# Altium PCB PCB2.PcbDoc
Units mm, origin at the board's own origin, x right, y up, seen from the top; angles counter-clockwise.
Board outline 171.96 x 151.38 mm, 2 copper layers (Top Layer, Bottom Layer); 22 components, 29 nets, 115 pads, 0 vias.
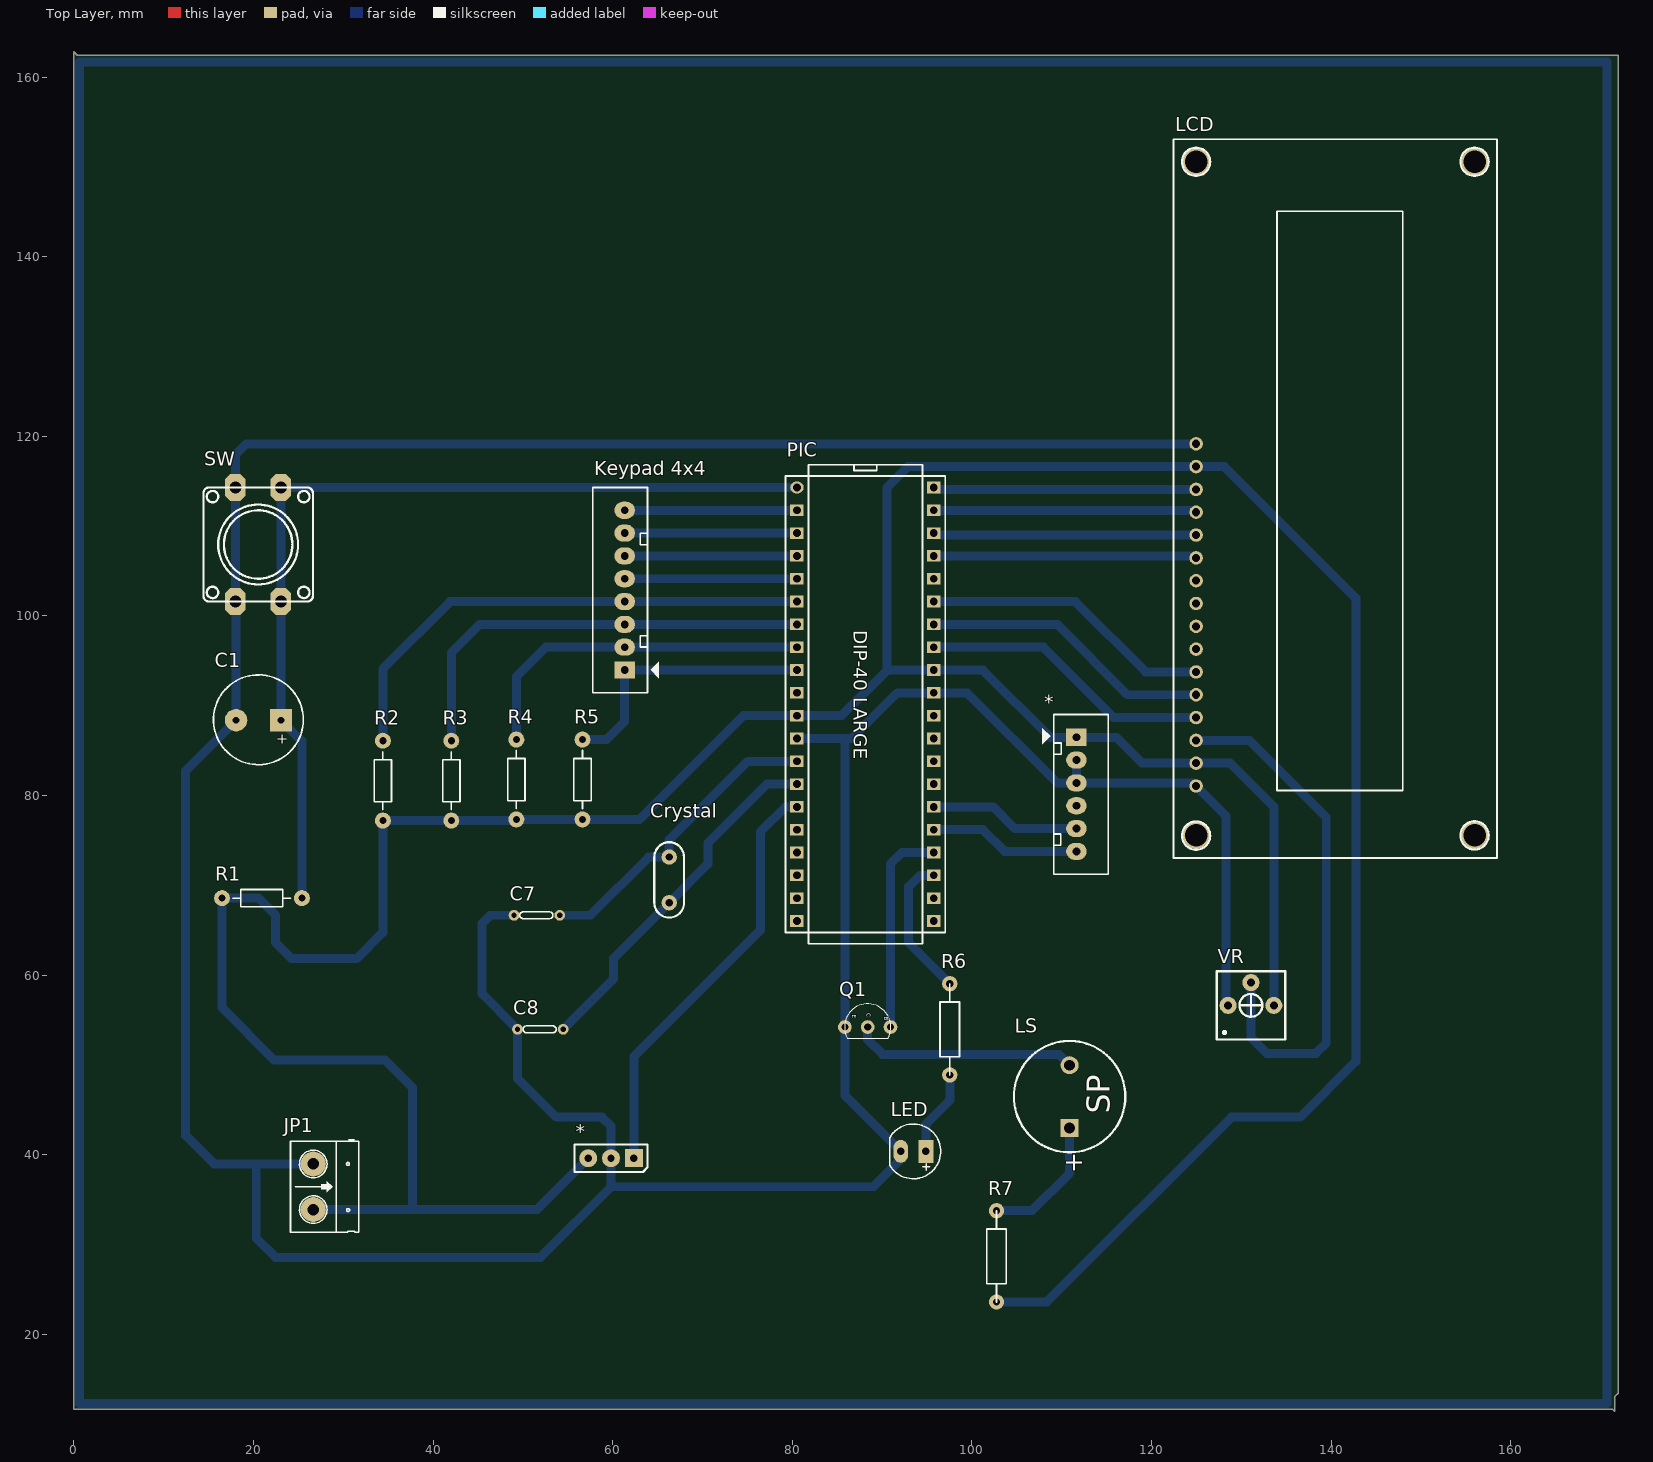
[diagram p0: Top Layer view]
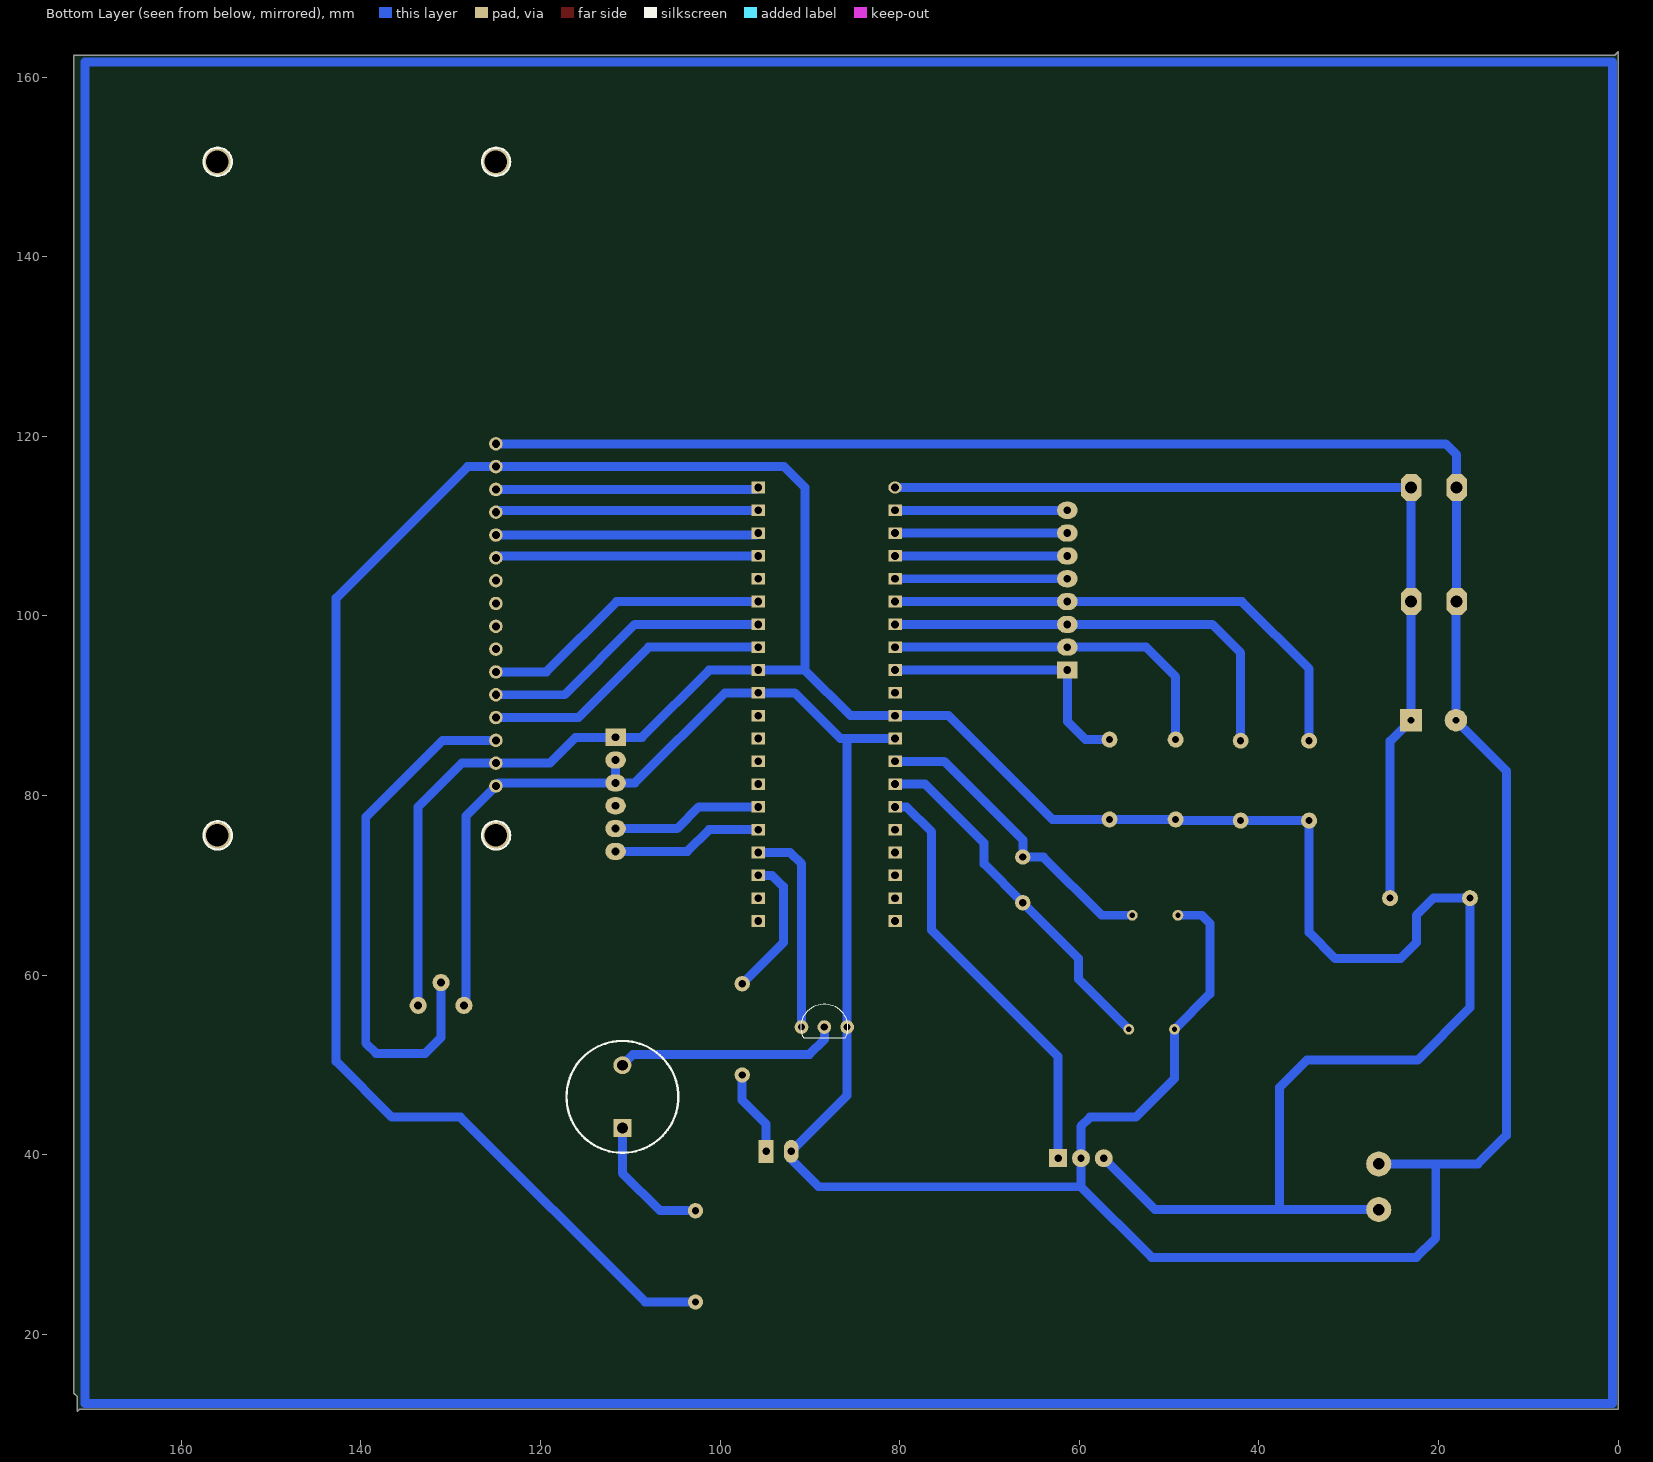
[diagram p1: Bottom Layer view, seen from below]
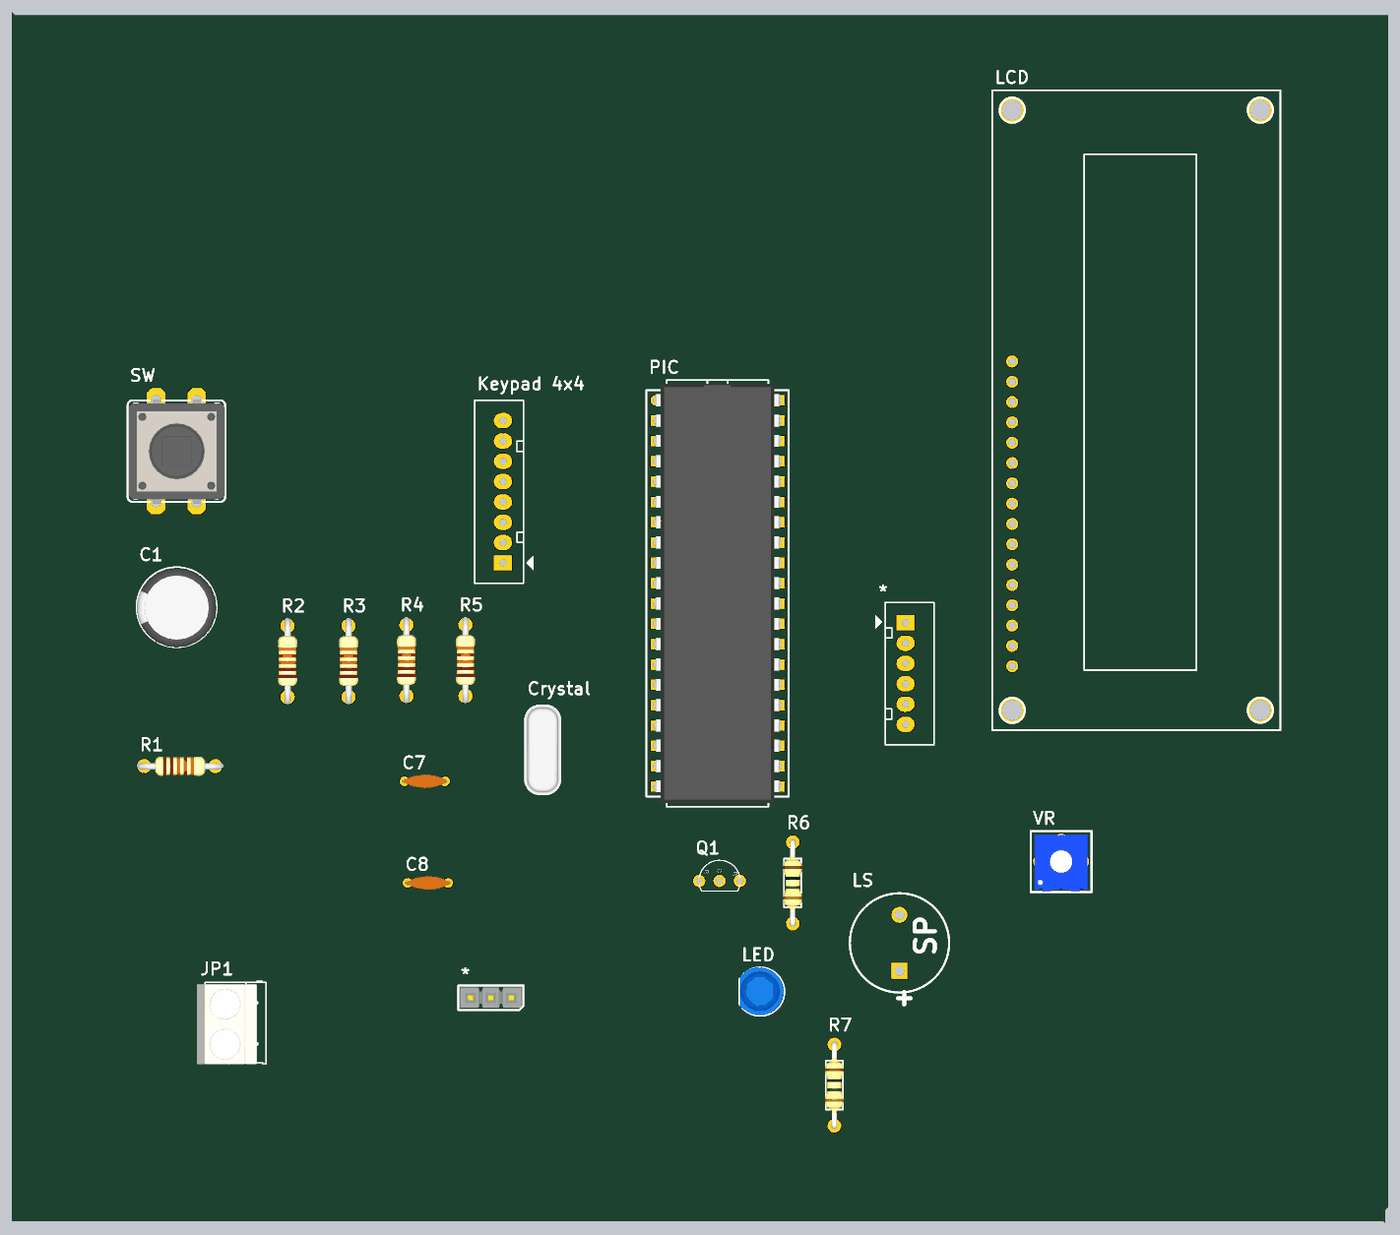
[diagram p2: 3D render of the assembled board from above, using the file's embedded part models]

## Layer stack, top to bottom
Top Solder: solder mask 0.0102, Solder Resist, Dk 3.5
Top Layer: signal copper 0.0356
Dielectric 1: dielectric 0.32, FR-4, Dk 4.8
Bottom Layer: signal copper 0.0356
Bottom Solder: solder mask 0.0102, Solder Resist, Dk 3.5

## Board outline
171.577,13.081 171.958,13.462 171.958,162.433 0.381,162.433 0,162.814 0,11.684 171.323,11.684 171.577,11.43

## Design rules (kind name [scope] priority, off if disabled: settings)
Clearance [All] p1: gap=0.5 ignorepadtopadclearanceinfootprint=FALSE
PolygonConnect [All] p1: connectstyle=Relief reliefconductorwidth=0.5 reliefentries=4 polygonreliefangle="90 Angle" airgapwidth=0.5
RoutingVias [All] p1: holewidth=0.711 width=1.27 viastyle="Through Hole" minholewidth=0.711 minwidth=1.27 maxholewidth=0.711 maxwidth=1.27
SolderMaskExpansion [All] p1: expansion=0.102
Width [All] p1: maxlimit=3 minlimit=0.5 preferedwidth=1
30 further rules are at their usual default settings.

## Classes and differential pairs
component class Sheet1: * C1 C7 C8 Crystal JP1 "Keypad 4x4" LED LS PIC R1 R2 R3 R4 R5 R6 R7 VR

## Components (designator, comment, footprint, x,y, rotation, side; value= is the part's Value field where it differs from the comment)
* "Servo" CON3-2 63.881,38.1 r180 top
* "Module Sim800a mini" CON6 111.633,86.487 r270 top
C1 "1000uF" "Cap 10mm" 20.574,88.392 r0 top value=10uF/50V
C7 "Capacitor Ceramic" Tu-ceramic 49.022,66.675 r0 top value=33p
C8 "Capacitor Ceramic" Tu-ceramic 49.403,53.975 r0 top value=33p
Crystal "20MHz" XTAL 66.294,70.612 r180 top
JP1 "Header 2_1" HED2 26.67,38.989 r270 top value="Header 2" (schematic designator JP2)
"Keypad 4x4" "Component_1" CON8 61.341,93.98 r90 top
LCD "LCD 16x2A" LCD16X2 124.956,81.065 r90 top value=LCD16x2A
LED "LED" "LED-5mm BLUE" 93.472,40.386 r180 top
LS "SPEAKER" speaker 110.871,46.482 r90 top
PIC "PIC16F877A-E/P" DIP.100/40/W.600/L2.100 88.138,90.17 r270 top
Q1 "C1815" TO92-ECB-W 88.392,54.229 r270 top
R1 "10k" R1/4W 25.4,68.58 r180 top value="R1/4W - 1K"
R2 "10k" R1/4W 34.417,86.106 r270 top value="R1/4W - 1K"
R3 "10k" R1/4W 42.037,86.106 r270 top value="R1/4W - 1K"
R4 "10k" R1/4W 49.276,86.233 r270 top value="R1/4W - 1K"
R5 "10k" R1/4W 56.642,86.233 r270 top value="R1/4W - 1K"
R6 "RESISTOR" "Res 10mm (1/2W)" 97.536,53.975 r270 top value=1K
R7 "RESISTOR" "Res 10mm (1/2W)" 102.743,28.702 r270 top value=1K
SW "SW-2P-S" SW-BIG 17.994,114.3 r90 top
VR "10K" VR_3362P 128.524,56.642 r0 top value="VR 10K"

## Footprints (in the part's own frame and the unit in brackets; to place one, negate y for a bottom-side part, rotate by r counter-clockwise, add the part's x,y. Pads: shape width x height; smd on the part's side, far side on the other; paste and mask are expansions set on the pad)
"Cap 10mm" [mm] "Cap d=10mm, pitch=5mm"
  rect 2.5x2.5 hole 0.75: 1(2.5,0)
  round 2.5 hole 0.75: 2(-2.5,0)
  silkscreen extent -5.01,-4.95 4.98,5.05, body extent -5.01,-5 5,5, height 16.31
CON3-2 [mm] "CON3 THANG"
  rect 2x2 hole 0.8: 1(1.524,-1.524)
  round 2 hole 0.8: 2(4.064,-1.524) 3(6.604,-1.524)
  silkscreen extent 0,-3.05 8.13,0, body extent 0.25,-2.79 7.87,-0.25, height 2.11
CON6 [mil] "CON6"
  rect 75x90 hole 34: 1(0,0)
  oval 75x90 hole 34: 2(100,0) 3(200,0) 4(300,0) 5(400,0) 6(500,0)
  silkscreen extent -100,-150 600,140
CON8 [mil] "CON8"
  rect 75x90 hole 34: 1(0,0)
  oval 75x90 hole 34: 2(100,0) 3(200,0) 4(300,0) 5(400,0) 6(500,0) 7(600,0) 8(700,0)
  silkscreen extent -100,-150 800,140
DIP.100/40/W.600/L2.100 [mil]
  oval 51.18x59.06 hole 34: 1(-950,-300)
  rect 51x59 / inner round 58 / far side rect 51x59 hole 34: 2(-850,-300) 3(-750,-300) 4(-650,-300) 5(-550,-300) 6(-450,-300) 7(-350,-300) 8(-250,-300) 9(-150,-300) 10(-50,-300) 11(50,-300) 12(150,-300) 13(250,-300) 14(350,-300) 15(450,-300) 16(550,-300) 17(650,-300) 18(750,-300) 19(850,-300) 20(950,-300) 21(950,300) 22(850,300) 23(750,300) 24(650,300) 25(550,300) 26(450,300) 27(350,300) 28(250,300) 29(150,300) 30(50,300) 31(-50,300) 32(-150,300) 33(-250,300) 34(-350,300) 35(-450,300) 36(-550,300) 37(-650,300) 38(-750,300) 39(-850,300) 40(-950,300)
  silkscreen extent -1050,-350 1050,350, body extent -1032,-305 1032,305, height 224
HED2 [mil] "Header 2, 2 pin, hight 300mil, Pin to Pin 200, Colour Green"
  round 110 hole 50: 1(0,0) 2(200,0)
  silkscreen extent -106,-100 300,200, body extent -92,-140 302,155, height 394
LCD16X2 [mm] "Character LCD 16x2"
  round 1.5 hole 0.9: 1(0,0) 2(2.54,0) 3(5.08,0) 4(7.62,0) 5(10.16,0) 6(12.7,0) 7(15.24,0) 8(17.78,0) 9(20.32,0) 10(22.86,0) 11(25.4,0) 12(27.94,0) 13(30.48,0) 14(33.02,0) 15(35.56,0) 16(38.1,0)
  round 3 hole 2.5 unplated: M1(-5.5,0) M2(69.5,0) M3(-5.5,-31) M4(69.5,-31)
  silkscreen extent -8,-33.5 72,2.5, body extent -8.01,-33.5 72,2.5, height 14.16
"LED-5mm BLUE" [mil] "LED-5mm BLUE"
  rect 65x100 hole 32: 1(-55,0)
  oval 65x100 hole 32: 2(55,0)
  silkscreen extent -120,-120 104,120, body extent -113,-120 100,117, height 339
R1/4W [mil] "R 1/4W, 2 Pin, 350mil"
  round 70 hole 31: 1(0,0) 2(350,0)
  silkscreen extent 48,-38 302,38, body extent -40,-47 386,47, height 111
"Res 10mm (1/2W)" [mil] "Resistor; 2 Leads; 1/2W; Solder Pad 35mil"
  round 67 hole 32: 1(-200,0) 2(200,0)
  silkscreen extent -200,-43 200,42, body extent -212,-46 212,45, height 96
speaker [mm] "Speaker footprint"
  rect 2x2 hole 1.2: 1(-3.5,0)
  round 2 hole 1.2: 2(3.5,0)
  silkscreen extent -6.2,-6.2 6.2,6.2, body extent -6.2,-6.2 6.2,6.2, height 10.02
SW-BIG [mil]
  oct 120x90 hole 52: 1(-500,0) 1(0,0) 2(-500,-200) 2(0,-200)
  silkscreen extent -500,-340 0,140, body extent -507,-338 5,134, height 288
TO92-ECB-W [mil] "C1815"
  round 60 hole 31.49 unplated: 1(0,100) 2(0,-100) 3(0,0)
  silkscreen extent -101,-102 50,102, body extent -90,-111 48,112, height 315
Tu-ceramic [mm] "Tu gom mini"
  round 1.2 hole 0.6: 1(0,0) 2(5.08,0)
  silkscreen extent 0.64,-0.38 4.32,0.38, body extent -0.38,-0.85 5.46,0.85, height 6.12
VR_3362P [mil] "Resistor Variable"
  round 75 hole 35: 1(0,0) 2(100,100) 3(200,0)
  silkscreen extent -50,-150 250,150, body extent -30,-148 230,130, height 185
XTAL [mil] "Crystal, Thru-Hole; 2 Leads; Body 3.1 x 8.2 mm (Dia.xH); Solder pad 35mil"
  round 67 hole 32: 1(0,100) 2(0,-100)
  silkscreen extent -65,-165 65,165, body extent -92,-223 92,223, height 139

## Part data
C1: library part CP1, "Cap P  0,1uF < 22uF , 16 - 50V", Description 1="10 => 220uF/6,3V/10V - 10uF => 100uF/16V", Description 2="0,1uF => 33uF/50V - 10uF => 22uF/63V", Description 3="0,47uF => 10uF/100V"
C7 C8: library part CapDecop, "Capacitor", LatestRevisionDate=17-Jul-2002, LatestRevisionNote="Re-released for DXP Platform.", PackageReference=RAD-0.3, Published=8-Jun-2000, Publisher="Altium Limited"
Crystal: library part XTAL, "Crystal Oscillator", LatestRevisionDate=17-Jul-2002, LatestRevisionNote="Re-released for DXP Platform.", PackageReference=R38, Published=8-Jun-2000, Publisher="Altium Limited"
JP1: "Header, 2-Pin", Manufacturer="Generic Components", Class=Connector
LCD: library part LCD16x2A, "LCD dipslay 16 char, 2 line"
PIC: "Enhanced FLASH Microcontroller, 8K (x14-Bit words) FLASH, 368 Bytes RAM, 40-Pin PDIP, Standard VDD Range, Extended Temperature", PackageDocument=2003, Code_JEDEC=MO-011, ComponentLink1Description="Manufacturer Link", ComponentLink1URL=http://www.microchip.com/index.asp, ComponentLink2Description=Datasheet, ComponentLink2URL=http://ww1.microchip.com/downloads/en/DeviceDoc/39582b.pdf, ComponentLink3Description="Packaging Specification", ComponentLink3URL=http://ww1.microchip.com/downloads/en/PackagingSpec/00049AD.pdf, DatasheetDocument=DS39582B_2003, LatestRevisionDate=4-Mar-2005, LatestRevisionNote="Stylized 3D Model Added.", Note="25mA sink/source per I/O.", PackageReference=PDIP600-40, Published=11-Oct-2004, Publisher="Altium Limited"
Q1: "Q2SC1815", PSpiceTemplate="Q^@REFDES %c %b %e @MODEL", COMPONENT=2SC1815, ComponentLink1Description="Digikey Part Link", ComponentLink2Description="Open Datasheet", ComponentLink2URL=H:\LIBRARY\LIBRARY.Datasheet\, Price=500VND, Published=13-April-2009, Publisher="Hoang Nguyen", Vendor=Digikey
R1 R2 R3 R4 R5: library part R, "Resistor 1/4W"
R6 R7: "Resistor", LatestRevisionDate=17-Jul-2002, LatestRevisionNote="Re-released for DXP Platform.", PackageReference=AXIAL-0.3, Published=8-Jun-2000, Publisher="Altium Limited"
SW: library part SW-2PIN-SMALL, "Switch Small 2 Pin", LatestRevisionDate=17-Jul-2002, LatestRevisionNote="Re-released for DXP Platform.", PackageReference=SPST-2, Published=24-Mar-1999, Publisher="Altium Limited"
VR: library part VR1, "Var Resistor"
LS: ComponentLink1Description="Digikey Part Link", ComponentLink2Description="Open Datasheet", ComponentLink2URL=H:\LIBRARY\LIBRARY.Datasheet\, Published=13-April-2009, Publisher="Hoang Nguyen", Vendor=Digikey

## Nets (pads, with @x,y where several pads share a name; then routed paths per layer and width w, separated by ;. In a path a pad name is that pad's centre, name@x,y a point inside that pad or via, vN(x,y) a via of type N, cw(c..) or ccw(c..) an arc to the next point about the centre after c; other vN are vias at no path point)
5V: *.1@111.633,86.487 *.3@57.277,39.624 JP1.2 LCD.2 LCD.15 PIC.11 PIC.32 R1.2 R2.2 R3.2 R4.2 R5.2 R7.2 VR.3 | length 436.6
  Bottom Layer w1: JP1.2 37.846,33.909 ; *.3@57.277,39.624 51.562,33.909 37.846,33.909 ; R7.2 108.331,23.622 128.905,44.196 136.525,44.196 142.748,50.419 142.748,101.981 128.104,116.625 LCD.15 92.876,116.625 90.551,114.3 90.551,93.98 ; VR.3 133.604,78.74 128.739,83.605 LCD.2 118.96,83.605 116.078,86.487 111.633,86.487 108.712,86.487 101.219,93.98 PIC.32 90.551,93.98 ; 37.846,33.909 37.719,34.036 37.719,47.498 34.671,50.546 22.352,50.546 16.51,56.388 R1.2 20.574,68.58 22.479,66.675 22.479,63.627 24.257,61.849 31.496,61.849 34.417,64.77 R2.2 R3.2 49.149,77.216 R4.2 R5.2 62.992,77.343 74.549,88.9 PIC.11 85.471,88.9 90.551,93.98
A0: "Keypad 4x4.8" PIC.2 | length 19.2
  Bottom Layer w1: 61.341,111.76 PIC.2
A1: "Keypad 4x4.7" PIC.3 | length 19.2
  Bottom Layer w1: 61.341,109.22 PIC.3
A2: "Keypad 4x4.6" PIC.4 | length 19.2
  Bottom Layer w1: 61.341,106.68 PIC.4
A3: "Keypad 4x4.5" PIC.5 | length 19.2
  Bottom Layer w1: 61.341,104.14 PIC.5
A4: "Keypad 4x4.4" PIC.6 R2.1 | length 57.2
  Bottom Layer w1: R2.1 34.417,94.107 41.91,101.6 61.341,101.6 PIC.6
A5: "Keypad 4x4.3" PIC.7 R3.1 | length 49.6
  Bottom Layer w1: R3.1 42.037,95.885 45.212,99.06 61.341,99.06 PIC.7
B0: LCD.4 PIC.33 | length 32.4
  Bottom Layer w1: PIC.33 107.95,96.52 115.785,88.685 LCD.4
B1: LCD.5 PIC.34 | length 32.4
  Bottom Layer w1: PIC.34 109.474,99.06 117.309,91.225 LCD.5
B2: LCD.6 PIC.35 | length 32.4
  Bottom Layer w1: PIC.35 111.506,101.6 119.341,93.765 LCD.6
B4: LCD.11 PIC.37 | length 29.3
  Bottom Layer w1: PIC.37 124.741,106.68 LCD.11
B5: LCD.12 PIC.38 | length 29.3
  Bottom Layer w1: PIC.38 95.973,109.005 LCD.12
B6: LCD.13 PIC.39 | length 29.3
  Bottom Layer w1: PIC.39 124.741,111.76 LCD.13
B7: LCD.14 PIC.40 | length 29.3
  Bottom Layer w1: PIC.40 95.973,114.085 LCD.14
E0: "Keypad 4x4.2" PIC.8 R4.1 | length 39.6
  Bottom Layer w1: R4.1 49.276,93.218 52.578,96.52 61.341,96.52 PIC.8
E1: "Keypad 4x4.1" PIC.9 R5.1 | length 30.4
  Bottom Layer w1: R5.1 59.309,86.233 61.341,88.265 61.341,93.98 PIC.9
GND: *.2 *.3@111.633,81.407 C1.2 C7.1 C8.1 JP1.1 LCD.1 LCD.16 LED.2 PIC.12 PIC.31 Q1.2 SW.1 VR.1 | length 457.6
  Bottom Layer w1: JP1.1 20.32,38.989 ; C7.1 46.355,66.675 45.466,65.786 45.466,57.912 C8.1 49.403,48.514 53.721,44.196 58.801,44.196 59.817,43.18 59.817,39.624 59.817,36.449 ; PIC.12 86.106,86.36 ; *.2@111.633,83.947 *.3@111.633,81.407 ; LCD.16 19.216,119.165 17.994,117.943 17.994,114.3 17.994,101.6 18.074,101.52 C1.2 12.446,82.764 12.446,42.164 15.621,38.989 20.32,38.989 ; VR.1 128.27,56.896 128.27,77.751 LCD.1 124.614,81.407 *.3@111.633,81.407 ; 20.32,38.989 20.32,30.734 22.479,28.575 51.943,28.575 59.817,36.449 ; 59.817,36.449 89.027,36.449 92.075,39.497 LED.2 85.852,46.609 Q1.2 85.852,86.106 86.106,86.36 ; 86.106,86.36 86.614,86.36 91.694,91.44 PIC.31 99.441,91.44 109.474,81.407 *.3@111.633,81.407
Net*_1: *.1@62.357,39.624 PIC.15 | length 47.4
  Bottom Layer w1: *.1@62.357,39.624 62.357,50.927 76.454,65.024 76.454,75.946 79.248,78.74 PIC.15
NetC1_1: C1.1 PIC.1 R1.1 SW.2 | length 104.5
  Bottom Layer w1: SW.2@22.86,101.219 SW.2@22.947,101.132 ; C1.1@22.947,88.138 C1.1@23.114,87.971 ; R1.1 25.4,86.066 C1.1 23.074,101.6 23.074,114.3 PIC.1
NetLCD_3: LCD.3 VR.2 | length 58.9
  Bottom Layer w1: LCD.3 130.898,86.145 139.446,77.597 139.446,52.451 138.303,51.308 132.842,51.308 131.064,53.086 VR.2
NetLED_1: LED.1 R6.2 | length 9.6
  Bottom Layer w1: LED.1 94.869,43.434 97.536,46.101 R6.2
NetLS_1: LS.1 R7.1 | length 14.9
  Bottom Layer w1: R7.1 106.68,33.782 110.871,37.973 LS.1
NetLS_2: LS.2 Q1.3 | length 25.2
  Bottom Layer w1: Q1.3@88.519,54.102 Q1.3 88.392,52.832 90.043,51.181 109.672,51.181 LS.2
NetPIC_23: PIC.23 R6.1 | length 16
  Bottom Layer w1: PIC.23 94.234,71.12 92.964,69.85 92.964,63.627 R6.1
NetPIC_24: PIC.24 Q1.1 | length 23.5
  Bottom Layer w1: Q1.1 90.932,72.39 92.202,73.66 PIC.24
Rx: *.5 PIC.26 | length 16.9
  Bottom Layer w1: PIC.26 102.362,78.74 104.775,76.327 *.5
TA1: C7.2 Crystal.2 PIC.13 | length 34.8
  Bottom Layer w1: C7.2 57.531,66.675 64.008,73.152 Crystal.2 66.294,75.057 75.057,83.82 PIC.13 PIC.13@80.391,83.947
TA2: C8.2 Crystal.1 PIC.14 | length 40
  Bottom Layer w1: C8.2 60.071,59.563 60.071,61.849 Crystal.1 70.612,72.39 70.612,74.715 77.177,81.28 PIC.14
Tx: *.6 PIC.25 | length 16.9
  Bottom Layer w1: PIC.25 101.219,76.2 103.632,73.787 *.6
pads on no net: *.4 LCD.7 LCD.8 LCD.9 LCD.10 LCD.M1 LCD.M2 LCD.M3 LCD.M4 PIC.10 PIC.16 PIC.17 PIC.18 PIC.19 PIC.20 PIC.21 PIC.22 PIC.27 PIC.28 PIC.29 PIC.30 PIC.36
copper on no net: | length 638.8
  Bottom Layer w1: 0.635,12.319 170.688,12.319 170.688,161.671 0.635,161.671 0.635,27.178 0.635,12.319

## Text inside footprints (layer, text, board x,y; h text height)
C1: Top Overlay "+" at 22.574,85.392 h2
LS: Top Overlay "SP" at 115.316,44.577 h2.54 r90; Top Overlay "+" at 112.268,37.973 h2.03 r90
PIC: Top Overlay "DIP-40 LARGE" at 86.868,98.425 h1.5 r270
Q1: Top Overlay "E" at 86.487,55.626 h0.76 r270; Top Overlay "B" at 90.043,55.372 h0.76 r270; Top Overlay "C" at 88.138,55.753 h0.76 r270